# Altium PCB motor_driver_002.PcbDoc
Units mil, origin at the board's own origin, x right, y up, seen from the top; angles counter-clockwise.
Board outline 1417.32 x 1417.32 mil, 2 copper layers (Top Layer, Bottom Layer); 35 components, 30 nets, 146 pads, 62 vias.
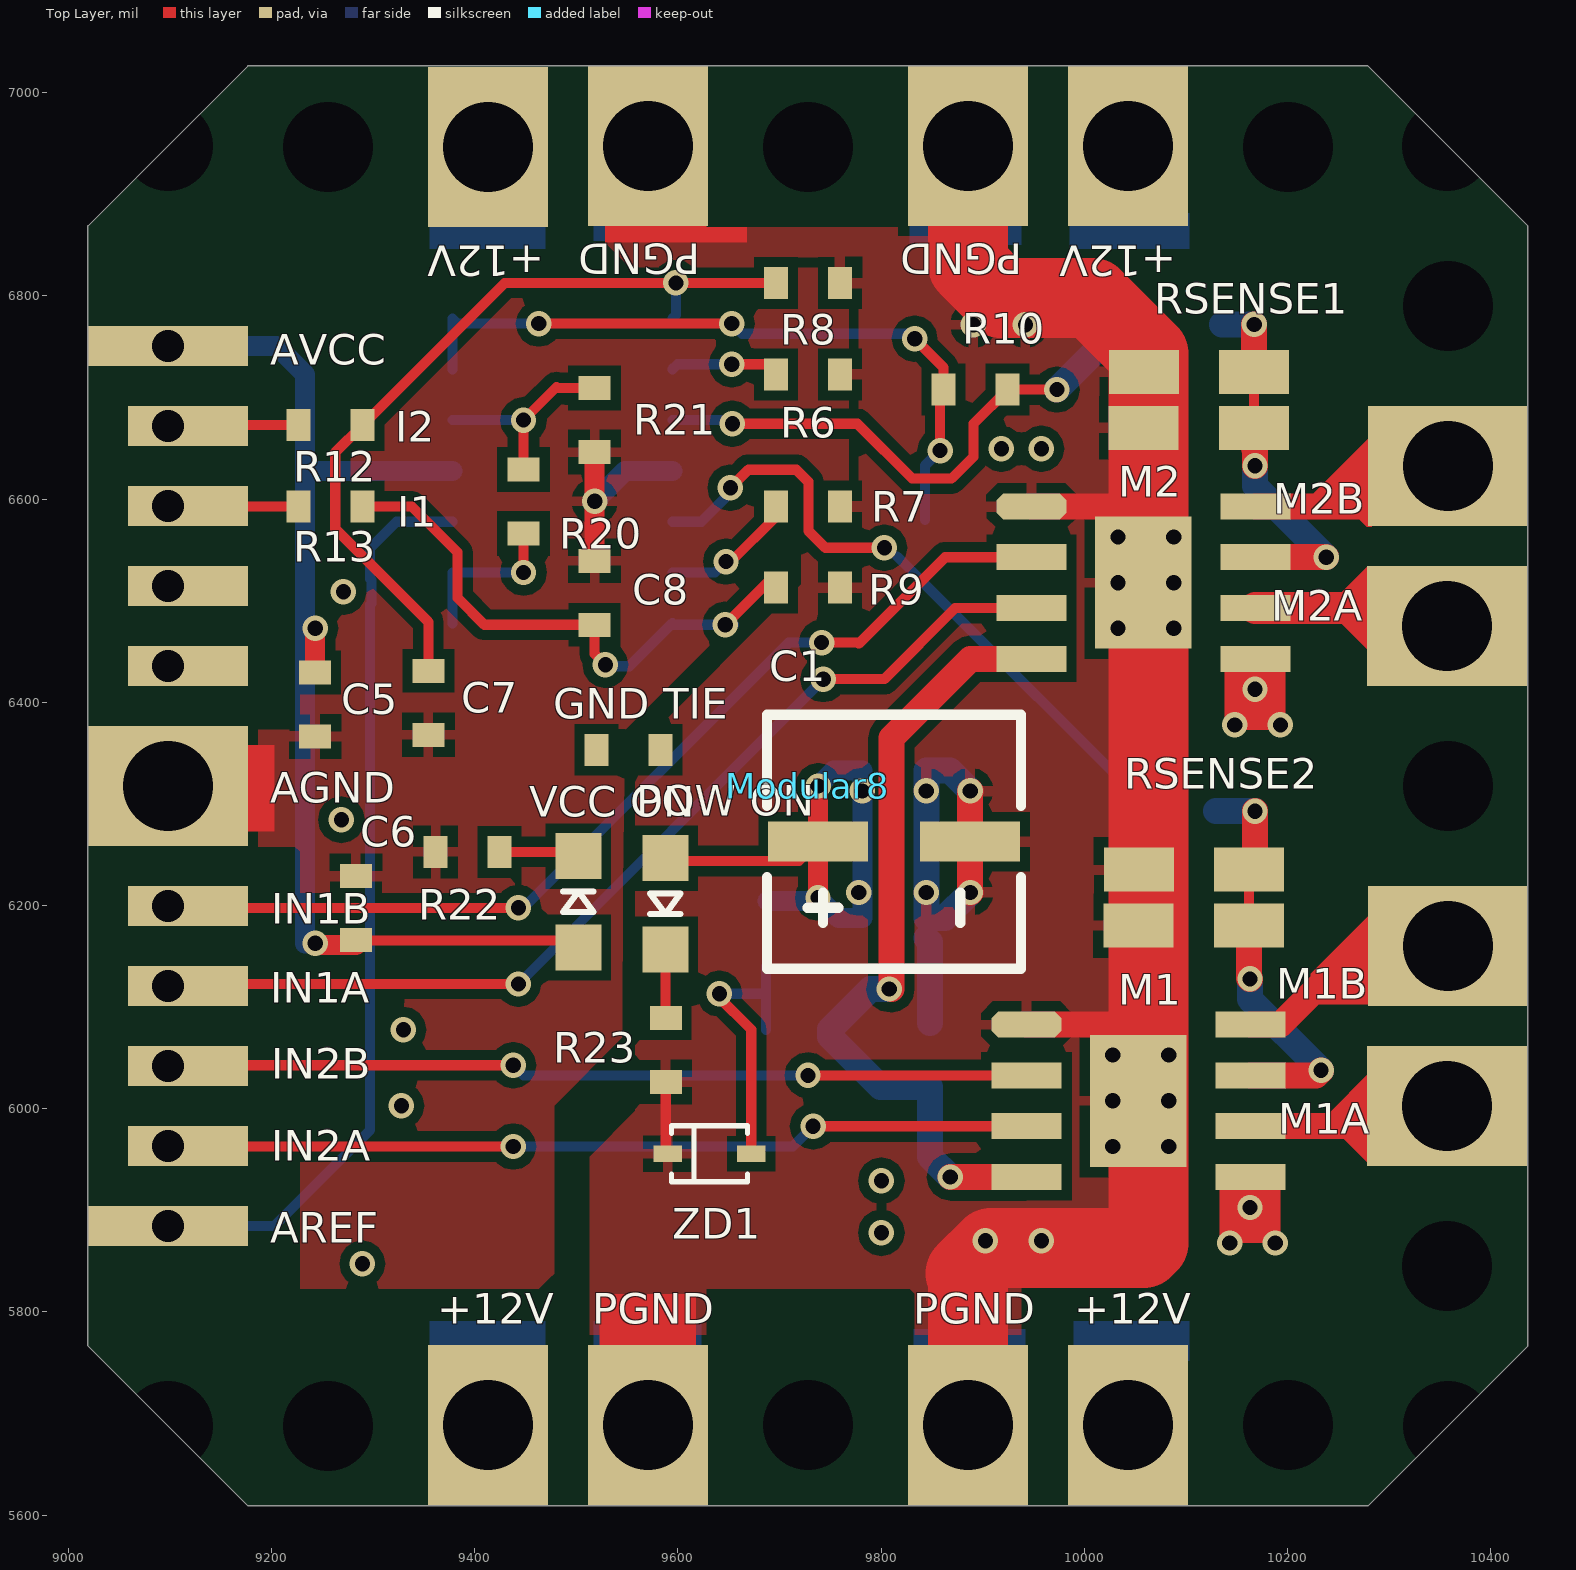
[diagram p0: Top Layer view]
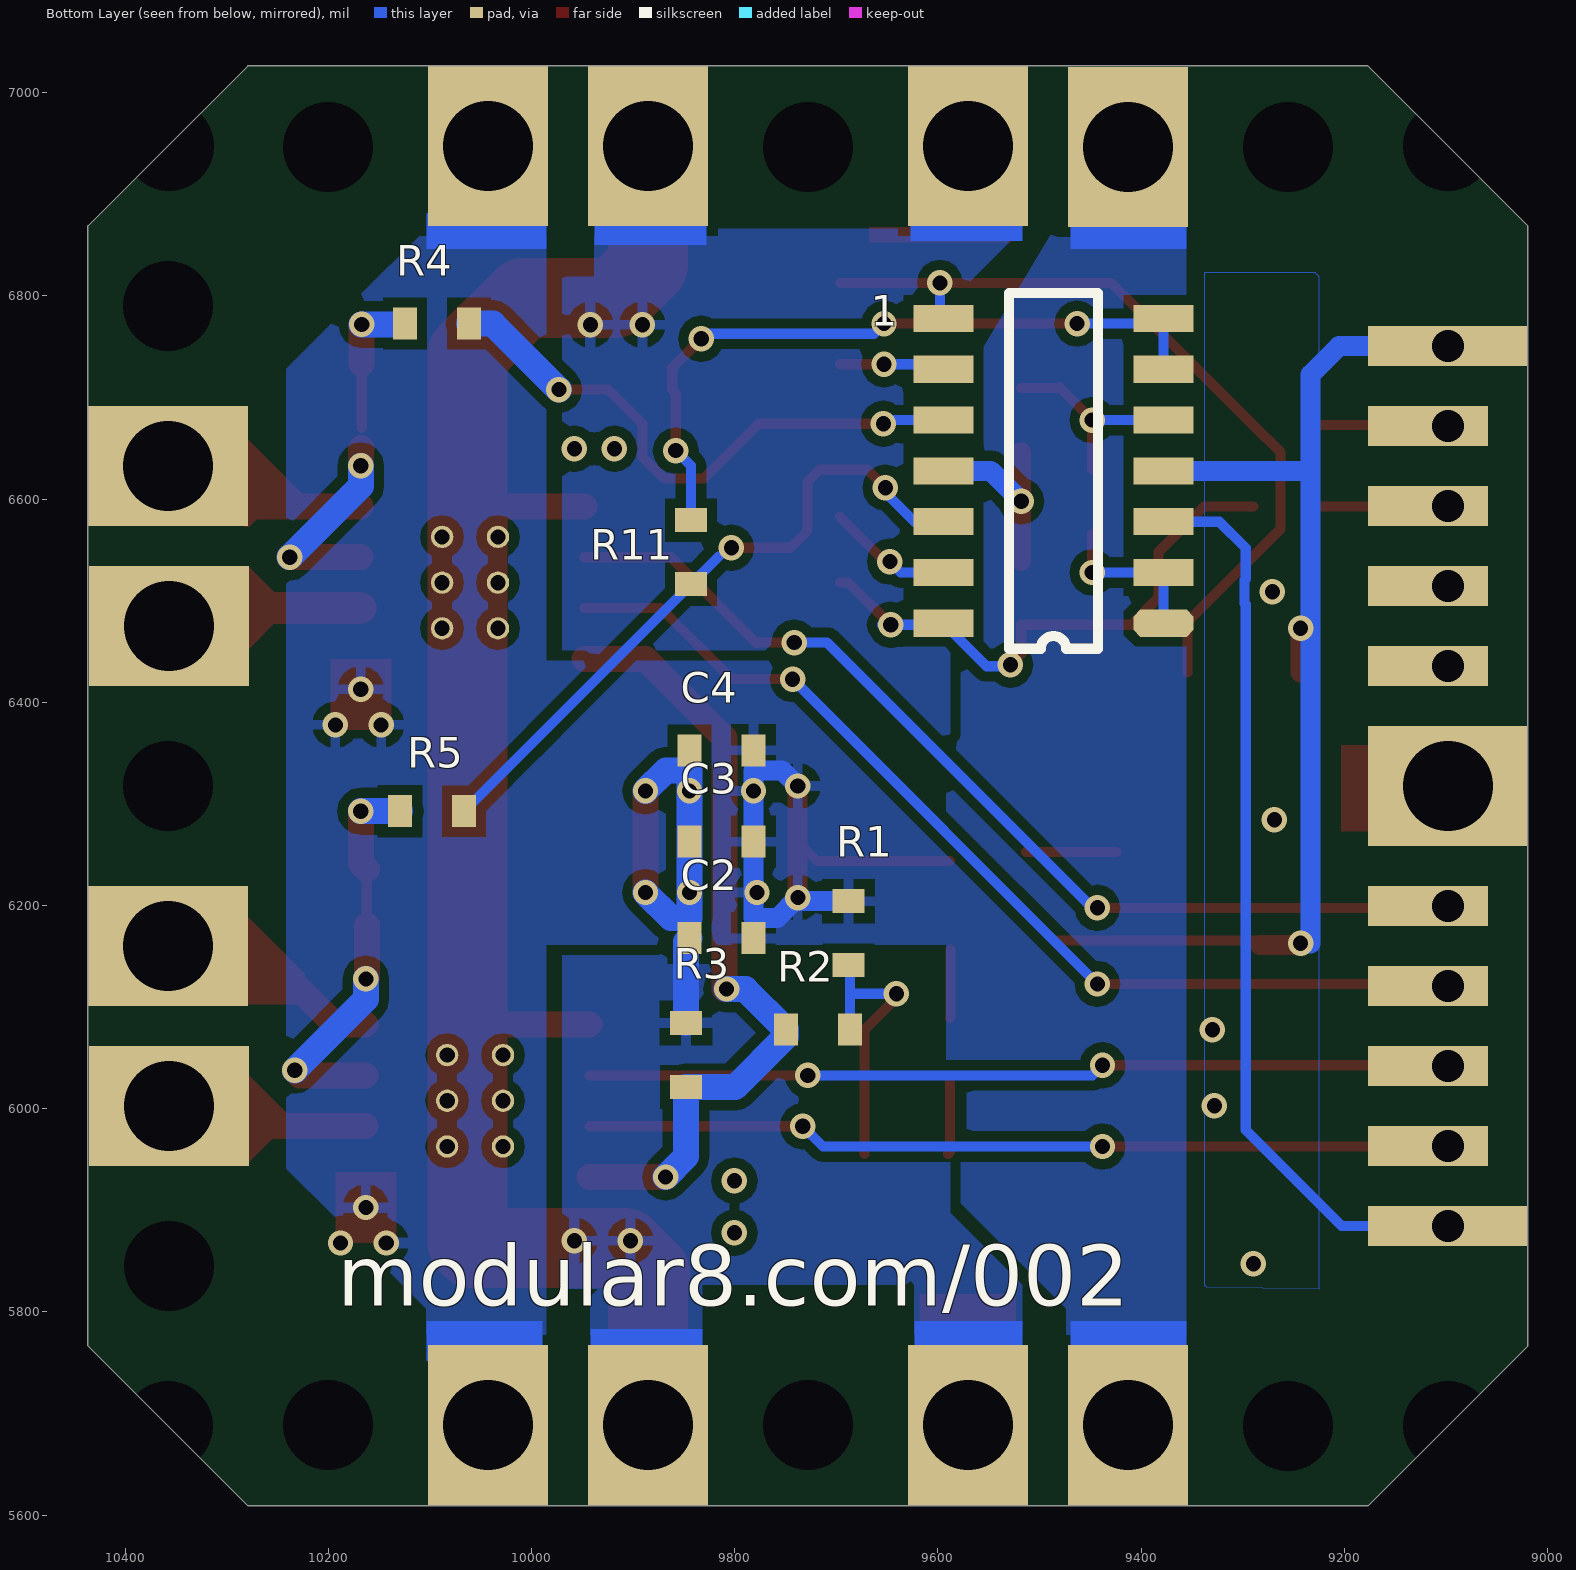
[diagram p1: Bottom Layer view, seen from below]

## Layer stack, top to bottom
Top Solder: solder mask 0.4, Solder Resist, Dk 3.5
Top Layer: signal copper 1.4
Dielectric 1: dielectric 12.6, FR-4, Dk 4.8
Bottom Layer: signal copper 1.4
Bottom Solder: solder mask 0.4, Solder Resist, Dk 3.5

## Board outline
9019.21,6868.94 9176.69,7026.42 10279.06,7026.42 10436.54,6868.94 10436.54,5766.57 10279.06,5609.09 9176.69,5609.09 9019.21,5766.57

## Design rules (kind name [scope] priority, off if disabled: settings)
Clearance [All] p1: gap=10
PolygonConnect [All] p1: connectstyle=Relief reliefconductorwidth=10 reliefentries=4 polygonreliefangle="90 Angle" airgapwidth=10
RoutingVias [All] p1: holewidth=28 width=50 viastyle="Through Hole" minholewidth=28 minwidth=50 maxholewidth=28 maxwidth=50
SolderMaskExpansion [All] p1: expansion=4
UnpouredPolygon [All] p1: allowunpoured=FALSE
Width [All] p1: maxlimit=118.11 minlimit=10 preferedwidth=10
29 further rules are at their usual default settings.

## Components (designator, comment, footprint, x,y, rotation, side; value= is the part's Value field where it differs from the comment)
1 "LM324DT" SO14 9377.95,6477.83 r0 bottom
C1 "C 100uF 25V" "RADIAL CAP 6.5MM" 9812.76,6262.83 r90 top
C2 "C 10uF 25V" 0603 9812.95,6167.83 r0 bottom
C3 "C 1uF 25V" 0603 9812.95,6262.83 r0 bottom
C4 "C 0.1uF 25V" 0603 9812.95,6352.83 r0 bottom
C5 "C 0.1uF 25V" 0603 9242.95,6397.83 r270 top
C6 "C 0.1uF 25V" 0603 9282.95,6197.52 r90 top
C7 "C 22uF 6.3V" 0603 9354.33,6399.61 r270 top
C8 "C 22uF 6.3V" 0603 9517.95,6507.83 r90 top
"GND TIE" "R 0" 0603 9551.18,6353.35 r180 top
M1 "A4950" "SOICN8 THERMAL PAD" 9942.95,6082.83 r0 top
M2 "A4950" "SOICN8 THERMAL PAD" 9947.95,6592.83 r0 top
Modular8 "modular8_power" "modular8 metric power" 9097.95,5687.83 r0 top locked
"POW ON" "LEDG" "0805 - LED" 9587.6,6201.77 r270 top
R1 "R 10k" 0603 9687.95,6172.83 r270 bottom
R2 "R 10k" 0603 9717.95,6077.83 r0 bottom
R3 "R 330" 0603 9847.95,6052.83 r90 bottom
R4 "R 10k 1%" 0603 10092.95,6772.83 r180 bottom
R5 "R 10k 1%" 0603 10097.95,6292.83 r180 bottom
R6 "R 10k 1%" 0603 9727.95,6722.83 r0 top
R7 "R 10k 1%" 0603 9727.95,6592.83 r0 top
R8 "R 300k 1%" 0603 9727.95,6812.83 r180 top
R9 "R 300k 1%" 0603 9727.95,6512.83 r180 top
R10 "R 300k 1%" 0603 9892.95,6707.83 r180 top
R11 "R 300k 1%" 0603 9842.95,6547.83 r90 bottom
R12 "R 10k" 0603 9257.95,6672.83 r180 top
R13 "R 10k" 0603 9257.95,6592.83 r180 top
R20 "R 300k 1%" 0603 9447.95,6597.83 r270 top
R21 "R 300k 1%" 0603 9517.95,6677.83 r270 top
R22 "R 680" 0603 9392.95,6252.83 r180 top
R23 "R 680" 0603 9587.95,6057.83 r270 top
RSENSE1 "R 0.01 0.5%" "1206 SPLIT" 10112.95,6697.83 r180 top
RSENSE2 "R 0.01 0.5%" "1206 SPLIT" 10107.95,6207.83 r180 top
"VCC ON" "LEDG" "0805 - LED" 9501.97,6203.74 r90 top
ZD1 "Zener 5.1V" SOD-323F 9630.91,5955.71 r180 top

## Footprints (in the part's own frame and the unit in brackets; to place one, negate y for a bottom-side part, rotate by r counter-clockwise, add the part's x,y. Pads: shape width x height; smd on the part's side, far side on the other; paste and mask are expansions set on the pad)
0603 [mm]
  rect 0.6x0.8 smd: 1(-0.8,0) 2(0.8,0)
  body extent -1.2,-0.5 1.2,0.5, height 0.01
"0805 - LED" [mil]
  rect 45x45 smd: 1(-45,0) 2(45,0)
  silkscreen extent -10,-15 10,15, body extent -72,-27 72,27, height 0
"1206 SPLIT" [mm]
  rect 1.75x1.1 smd: 1(-1.375,-0.7) 1(-1.375,0.701) 2(1.375,-0.7) 2(1.386,0.701)
  body extent -2.35,-1.35 2.36,1.35
"modular8 metric power" [mm]
  rect 0x0 hole 2.25 unplated copper offset 0.5,0: 999(0,0) 999(0,32) 999(4,0) 999(4,31.976) 999(16,0.024) 999(16,31.976) 999(28,0.024) 999(28,31.976) 999(31.976,4) 999(31.976,32) 999(32,0) 999(32,16) 999(32,28)
  rect 3x1 hole 0.8 copper offset 0.5,0: A_0(0,25) A_1(0,23) A_2(0,21) A_3(0,19) A_4(0,13) A_5(0,11) A_6(0,9) A_7(0,7)
  rect 4x3 hole 2.25: A_GND(0,16) C_0(31.976,8) C_1(32,12) C_2(31.976,20) C_3(32,24)
  rect 4x1 hole 0.8: A_V1(0,27) A_V2(0,5)
  rect 3x4 hole 2.25: B_GND(12,0.024) B_GND(20,0.024) B_VCC(8,0.024) B_VCC(24,0.024) D_GND(12,32) D_GND(20,32) D_VCC(8,31.976) D_VCC(24,32)
  body extent -2,-2 34,34
"RADIAL CAP 6.5MM" [mm]
  rect 1x2.5 smd: 1(0,1.9) 2(0,-1.9)
  silkscreen extent -3.18,-3.18 3.18,3.18, body extent -3.3,-3.3 3.3,3.3
SO14 [mm]
  oct 1.5x0.677 smd: 1(0,0)
  rect 1.5x0.677 smd: 2(0,-1.27) 3(0,-2.54) 4(0,-3.81) 5(0,-5.08) 6(0,-6.35) 7(0,-7.62) 8(5.5,-7.62) 9(5.5,-6.35) 10(5.5,-5.08) 11(5.5,-3.81) 12(5.5,-2.54) 13(5.5,-1.27) 14(5.5,0)
  silkscreen extent 1.64,-8.25 3.86,0.64
SOD-323F [mm]
  rect 0.71x0.403 smd: 1(-1.045,0) 2(1.045,0)
  silkscreen extent -0.95,-0.7 0.95,0.7, body extent -1.4,-0.7 1.4,0.7
"SOICN8 THERMAL PAD" [mil]
  oct 68.9x25.59 smd: 1(0,0)
  round 22 hole 15 unplated: 1(85,-120) 1(85,-75) 1(85,-30) 1(140,-120) 1(140,-75) 1(140,-30)
  rect 95x130 smd: 1(110,-75)
  rect 68.9x25.59 smd: 2(0,-50) 3(0,-100) 4(0,-150) 5(220.47,-150) 6(220.47,-100) 7(220.47,-50) 8(220.47,0)
  body extent -38,-167 259,17

## Via types
v1: diameter 25, hole 15, Top Layer to Bottom Layer, 62 vias

## Nets (pads, with @x,y where several pads share a name; then routed paths per layer and width w, separated by ;. In a path a pad name is that pad's centre, name@x,y a point inside that pad or via, vN(x,y) a via of type N, cw(c..) or ccw(c..) an arc to the next point about the centre after c; other vN are vias at no path point)
2.048V: 1.6 1.7 R10.2 R11.2 | length 711.3
  Top Layer w10: v1(9462.95,6772.83) v1(9652.95,6772.83) ; v1(9832.95,6757.83) 9861.46,6729.33 R10.2 9857.95,6704.33 v1(9857.95,6647.83)
  Bottom Layer w10: 1.6 1.7 9382.95,6772.83 v1(9462.95,6772.83) ; v1(9652.95,6772.83) 9662.95,6762.83 9827.95,6762.83 v1(9832.95,6757.83) ; R11.2 9842.95,6632.83 v1(9857.95,6647.83)
4.096V: 1.3 Modular8.A_V2 | length 903.6
  Bottom Layer w10: Modular8.A_V2 9202.6,5884.69 9296.99,5979.08 9296.99,6496.29 9298.17,6497.47 9298.17,6520.25 9296.99,6521.43 9296.99,6551.87 9322.95,6577.83 1.3
5V: 1.4 "VCC ON.1" C5.1 C6.1 Modular8.A_V1 | length 1136.6
  Top Layer w10: C6.1 9282.95,6165.49 9483.33,6165.49
  Top Layer w19.68: v1(9242.95,6162.83) 9244.45,6161.34 C6.1@9282.95,6161.34 ; C5.1 v1(9242.95,6472.83)
  Bottom Layer w19.68: Modular8.A_V1 9204.96,6750.83 9233.03,6722.76 9233.03,6627.83 ; v1@9233.03,6162.83 9233.03,6627.83 ; 1.4 9233.03,6627.83
+12V: "POW ON.1" C1.1 C2.1 C3.1 C4.1 M1.5 M2.5 Modular8.B_VCC Modular8.D_VCC R1.1 | length 565.8
  Top Layer w10: 9587.95,6243.83 9718.95,6243.83 C1.1
  Top Layer w19.68: v1(9737.76,6207.83) 9737.95,6208.03 C1.1 v1(9737.95,6317.64)
  Bottom Layer w19.68: R1.1 9734.25,6204.33 v1(9737.76,6207.83) 9757.76,6187.83 9781.46,6187.83 C3.1 9781.46,6332.83 9753.15,6332.83 v1(9737.95,6317.64)
  other v1: 10142.95,5867.83 10187.95,5867.83 10162.95,5902.83 9777.95,6212.83 9781.46,6312.83 10147.95,6377.83 10192.95,6377.83 10167.95,6412.83
AGND: 1.11 C5.2 C6.2 C7.2 C8.2 Modular8.A_GND R21.2 R22.2 | length 196
  Top Layer w19.68: C8.2 v1(9517.95,6597.83) R21.2
  Bottom Layer w19.68: v1(9517.95,6597.83) 9547.95,6627.83 1.11
CURRENT1: Modular8.A_1 R13.2 | length 128.7
  Top Layer w10: Modular8.A_1 9098.46,6592.83 R13.2
CURRENT2: Modular8.A_0 R12.2 | length 128.8
  Top Layer w10: Modular8.A_0 9098.7,6672.83 R12.2
M1A: M1.6 Modular8.C_0 | length 201.7
  Top Layer w25.59: M1.6 10336.88,5982.83 Modular8.C_0
M1B: M1.8 Modular8.C_1 | length 226.4
  Top Layer w25.59: M1.8 10192.95,6082.83 10270.39,6160.28 Modular8.C_1
M2A: M2.6 Modular8.C_2 | length 227.4
  Top Layer w31.5: M2.6 10339.24,6492.83 Modular8.C_2 Modular8.C_2@10334.44,6452.83
M2B: M2.8 Modular8.C_3 | length 260.9
  Top Layer w25.59: M2.8 10317.91,6592.83 Modular8.C_3 Modular8.C_3@10302.83,6632.72
Net1_1: 1.1 1.2 R20.2 | length 158.5
  Top Layer w10: v1(9447.95,6527.83) R20.2
  Bottom Layer w10: 1.1 1.2 v1(9447.95,6527.83)
Net1_5: 1.5 R20.1 R21.1 | length 202.4
  Top Layer w10: R20.1 v1(9447.95,6677.83) 9480.45,6710.33 9481.46,6709.33 R21.1
  Bottom Layer w10: 1.5 v1(9447.95,6677.83)
Net1_8: 1.8 C7.1 R8.2 R12.1 | length 794
  Top Layer w10: C7.1@9354.33,6429.33 9354.33,6479.18 9262.64,6570.87 9262.64,6646.02 R12.1 9429.45,6812.83 v1(9597.95,6812.83) R8.2
  Bottom Layer w10: 1.8 9597.95,6781.3 v1(9597.95,6812.83)
Net1_9: 1.9 R6.1 | length 104
  Top Layer w10: v1(9652.95,6732.83) R6.1@9696.46,6732.83
  Bottom Layer w10: 1.9 9599.49,6732.83 v1(9652.95,6732.83)
Net1_10: 1.10 R4.2 R10.1 | length 567.5
  Top Layer w10: v1(9653.54,6674.21) 9776.57,6674.21 9830.45,6620.33 9869.34,6620.33 9890.81,6641.8 9890.81,6674.19 R10.1 v1(9972.95,6707.83)
  Bottom Layer w10: 1.10 v1@9649.61,6677.83
  Bottom Layer w25.59: v1(9972.95,6707.83) 10037.95,6772.83 R4.2
Net1_12: 1.12 R5.2 R11.1 | length 645.9
  Top Layer w10: v1(9651.57,6611.22) 9669.29,6628.94 9716.54,6628.94 9728.35,6617.13 9728.35,6568.9 9745.08,6552.17 v1(9803.15,6552.17)
  Bottom Layer w10: 1.12 9622.95,6577.83 v1@9653.96,6608.84 ; 9815.71,6543.58 R11.1 R5.2
Net1_13: 1.13 R7.1 | length 124.8
  Top Layer w10: v1(9647.2,6538.58) 9652.2,6538.58 R7.1@9696.46,6582.83
  Bottom Layer w10: 1.13 9636.46,6527.83 v1(9647.2,6538.58)
Net1_14: 1.14 C8.1 R9.2 R13.1 | length 559.2
  Top Layer w10: R13.1 9337.95,6592.83 9382.95,6547.83 9382.95,6502.83 9409.45,6476.34 C8.1 9517.95,6447.6 v1(9528.54,6437.01) ; v1(9646.46,6476.34) 9687.95,6517.83 R9.2@9696.46,6517.83
  Bottom Layer w10: v1(9528.54,6437.01) 9530.04,6435.51 9552.17,6435.51 1.14 9595.98,6476.34 v1(9646.46,6476.34) v1@9654.96,6476.34
NetM1_2: M1.2 Modular8.A_6 | length 854.4
  Top Layer w10: Modular8.A_6 9098.62,6042.83 v1(9437.95,6042.83) ; v1(9727.95,6032.83) M1.2
  Bottom Layer w10: v1(9437.95,6042.83) 9447.95,6032.83 v1(9727.95,6032.83) v1@9727.95,6037.83
NetM1_3: M1.3 Modular8.A_7 | length 874.7
  Top Layer w10: Modular8.A_7 9098.54,5962.83 v1(9437.95,5962.83) ; v1(9732.95,5982.83) M1.3
  Bottom Layer w10: Modular8.A_7@9098.54,5962.83 Modular8.A_7 Modular8.A_7@9112.36,5977.83 ; v1(9437.95,5962.83) 9712.95,5962.83 v1(9732.95,5982.83)
NetM1_4: M1.4 M2.4 R2.2 R3.1 | length 789.8
  Top Layer w25.59: v1@9809.96,6117.83 9809.96,6364.84 9887.95,6442.83 M2.4 ; v1(9867.95,5932.83) M1.4
  Bottom Layer w25.59: v1(9807.95,6117.83) 9789.45,6117.83 R2.2 9749.45,6071.34 9799.45,6021.34 R3.1 9847.95,5952.83 v1(9867.95,5932.83)
NetM1_7: M1.7 R5.1 RSENSE2.1 | length 396.9
  Top Layer w10: RSENSE2.1@10162.09,6180.24 RSENSE2.1@10162.09,6235.39
  Top Layer w25.59: RSENSE2.1@10162.09,6180.24 10162.09,6128.7 v1(10162.95,6127.83) ; RSENSE2.1@10162.09,6235.39 10167.95,6241.26 v1(10167.95,6292.83) ; M1.7 10227.95,6032.83 v1(10232.95,6037.83)
  Bottom Layer w25.59: R5.1 v1(10167.95,6292.83) ; v1(10162.95,6127.83) 10162.95,6107.83 v1(10232.95,6037.83)
NetM2_2: M2.2 Modular8.A_4 | length 971.4
  Top Layer w10: Modular8.A_4 Modular8.A_4@9099.76,6197.83 ; Modular8.A_4@9122.95,6197.52 9442.64,6197.52 v1(9442.95,6197.83) ; v1(9741.34,6458.81) 9776.97,6458.81 9777.95,6457.83 9862.95,6542.83 M2.2
  Bottom Layer w10: v1(9442.95,6197.83) 9447.95,6197.83 9708.93,6458.81 v1(9741.34,6458.81)
NetM2_3: M2.3 Modular8.A_5 | length 1004.1
  Top Layer w10: Modular8.A_5 9099.88,6122.83 v1(9442.95,6122.83) ; v1(9742.95,6422.83) 9802.95,6422.83 9872.95,6492.83 M2.3
  Bottom Layer w10: v1(9442.95,6122.83) v1(9742.95,6422.83)
NetM2_7: M2.7 R4.1 RSENSE1.1 | length 332.3
  Top Layer w10: RSENSE1.1@10167.09,6670.24 RSENSE1.1@10167.09,6725.39
  Top Layer w25.59: RSENSE1.1@10167.09,6650.24 10167.95,6649.37 v1(10167.95,6632.83) ; RSENSE1.1@10167.09,6732.83 v1(10167.09,6771.97) ; M2.7 v1(10237.95,6542.83)
  Bottom Layer w25.59: R4.1@10135.32,6771.97 v1(10167.09,6771.97) ; v1(10167.95,6632.83) 10167.95,6612.83 v1(10237.95,6542.83)
"NetPOW ON_2": "POW ON.2" R23.1 | length 67.6
  Top Layer w10: 9587.6,6156.77 9587.6,6089.69 R23.1
NetR1_2: R1.2 R2.1 ZD1.1 | length 279.1
  Top Layer w10: v1@9638.78,6111.22 9672.05,6077.95 ZD1.1
  Bottom Layer w10: v1(9640.75,6113.19) 9686.46,6113.19 ; R2.1 9686.46,6113.19 ; R1.2 9686.46,6139.84 9686.46,6113.19
NetR22_1: "VCC ON.2" R22.1 | length 88.5
  Top Layer w10: R22.1 9512.95,6252.83
PGND: C1.2 C2.2 C3.2 C4.2 M1.1 M2.1 Modular8.B_GND Modular8.D_GND R3.2 R6.2 R7.2 R8.1 R9.1 R23.2 RSENSE1.2 RSENSE2.2 ZD1.2 | length 2301.6
  Top Layer w10: R23.2 9587.95,5957.52 ZD1.2
  Top Layer w25.59: v1(9887.76,6212.83) 9887.56,6213.03 C1.2 9887.56,6312.64 v1(9887.76,6312.83) ; M1.1@9942.95,6082.83 10057.95,6082.83 10062.95,6077.83 ; M2.1@9947.95,6592.83 10057.95,6592.83 10062.95,6597.83 ; M2.1@10057.95,6552.83 M2.1@10062.95,6557.83
  Top Layer w78.74: Modular8.B_GND@9885.35,5688.79 9885.35,5835.43 9882.95,5837.83 9907.95,5862.83 10057.95,5862.83 10062.95,5867.83 10062.95,6077.83 10062.95,6557.83 10062.95,6597.83 10062.95,6742.83 10007.95,6797.83 9917.95,6797.83 9885.35,6830.43 Modular8.D_GND@9885.35,6947.68
  Bottom Layer w25.59: C2.2 9847.95,6164.33 R3.2 ; v1(9887.76,6212.83) 9862.76,6187.83 9844.45,6187.83 v1(9844.45,6212.83) C3.2 9844.45,6332.83 9867.76,6332.83 v1(9887.76,6312.83)
  other v1: 9902.56,5870.08 9957.68,5870.08 9844.45,6312.83 9890.75,6771.65 9941.93,6771.65
pads on no net: "GND TIE.1" "GND TIE.2" Modular8.999 Modular8.A_2 Modular8.A_3
copper on no net:
  other v1: 9289.37,5847.44 9800.2,5877.95 9800.2,5929.13 9327.76,6002.95 9329.72,6077.76 9268.7,6284.45 9270.67,6508.86 9918.31,6649.61 9957.68,6649.61

## Polygon pours and split planes (outlines as drawn)
PGND on Top Layer "Bottom Layer-No Net" (solid, remove dead copper, pour order 4): 9597.95,6892.83 9512.95,6867.83 9559.92,6820.87 9627.95,6820.87 9721.16,6779.63 9721.16,6516.04 9557.95,6352.83 9557.95,5997.83 9512.95,5952.83 9512.95,5752.83 9627.95,5752.83 9627.95,5822.83 9827.95,5822.83 9832.95,5817.83 9832.95,5747.83 9927.95,5747.83 9937.95,5757.83 9937.95,5862.83 10057.95,5862.83 10062.95,5867.83 10062.95,6742.83 10042.95,6742.83 9987.95,6797.83 9955.35,6830.43 9885.35,6830.43 9885.35,6887.83 9875.35,6877.83 9827.95,6877.83 9827.95,6867.83 9632.95,6867.83 9607.95,6892.83
AGND on Top Layer "Bottom Layer-No Net" (solid, remove dead copper, pour order 6): 9167.95,6257.83 9222.95,6257.83 9227.95,6252.83 9227.95,5822.83 9462.95,5822.83 9472.95,5832.83 9477.95,5837.83 9477.95,5997.83 9477.95,6002.83 9545.27,6070.16 9545.8,6219.26 9547.95,6372.83 9667.95,6492.83 9672.95,6492.83 9767.95,6492.83 9772.95,6497.83 9767.95,6502.83 9767.95,6602.83 9767.95,6607.83 9767.95,6827.83 9547.95,6827.83 9227.95,6827.83 9227.95,6377.83 9232.95,6372.83 9147.95,6372.83 9147.95,6272.83
PGND on Bottom Layer "Bottom Layer-No Net" (solid, remove dead copper, pour order 21): 9516.73,6866.14 9587.6,6795.28 9587.6,6748.03 9587.6,5897.64 9579.72,5889.76 9516.73,5826.77 9516.73,5818.9 9516.73,5751.97 9520.67,5748.03 9532.48,5759.84 9623.03,5759.84 9623.03,5826.77 9626.97,5830.71 9630.91,5826.77 9831.69,5826.77 9831.69,5748.03 9835.63,5751.97 9941.93,5751.97 9941.93,5814.96 9934.06,5822.83 9969.49,5822.83 9969.49,6822.83 9965.55,6818.9 9937.99,6818.9 9937.99,6875.72 9845.29,6872.23 9827.76,6866.14
+12V on Bottom Layer "Bottom Layer-No Net" (solid, remove dead copper, pour order 12): 10103.35,6885.83 10103.35,6866.14 10241.14,6728.35 10241.14,5940.94 10103.35,5803.15 10103.35,5744.09 9985.24,5744.09 9985.24,5803.15 9985.24,6885.83
+12V on Bottom Layer "Bottom Layer-No Net" (solid, remove dead copper, pour order 14): 9355.32,6885.83 9355.32,5744.09 9473.43,5744.09 9473.43,5803.15 9591.54,5921.26 9591.54,6669.29 9591.54,6688.98 9473.43,6885.83
+12V on Bottom Layer "Bottom Layer-No Net" (solid, remove dead copper, pour order 19): 9493.11,6440.94 9493.11,6157.48 9497.05,6153.54 9504.92,6161.42 10099.41,6161.42 10099.41,6440.94
no net on Bottom Layer "Bottom Layer-No Net" (solid, remove dead copper, shelved, pour order 8): 9224.41,5822.83 9224.41,6818.9 9226.38,6820.87 9228.35,6822.83 9337.6,6822.83 9337.6,5826.77 9335.63,5824.8

## Other copper
Top Layer:
  rectangle net AGND: 9162.95,6272.83 9202.95,6357.83
  rectangle net PGND: 9612.95,6852.83 9667.95,6867.83
  rectangle net PGND: 9527.95,6852.83 9627.95,6882.83
  rectangle net PGND: 9522.95,5747.83 9617.95,5817.83
  rectangle net +12V: 10132.95,5867.83 10192.95,5937.83
  rectangle net +12V: 10137.95,6372.83 10197.95,6442.83
  region net M1A: 10277.95,5947.83 10237.95,5987.83 10237.95,5992.83 10282.95,6037.83 10282.95,5947.83
  region net M1B: 10222.95,6102.83 10222.95,6132.83 10287.95,6197.83 10287.95,6102.83
  region net M2B: 10277.95,6572.83 10247.95,6602.83 10222.95,6602.83 10282.95,6662.83 10282.95,6572.83
  region net M2A: 10277.95,6532.83 10247.95,6502.83 10247.95,6477.83 10252.95,6477.83 10277.95,6452.83 10287.95,6452.83 10292.95,6457.83 10292.95,6532.83
Bottom Layer:
  rectangle net PGND: 9831.69,5755.91 9941.93,5783.46
  rectangle net PGND: 9516.73,5759.84 9623.03,5791.34
  rectangle net PGND: 9827.76,6850.39 9937.99,6874.02
  rectangle net PGND: 9516.73,6854.33 9626.97,6874.02
  rectangle net +12V: 9355.32,6846.46 9469.49,6877.95
  rectangle net +12V: 9985.24,6846.46 10103.35,6881.89
  rectangle net +12V: 9989.17,5751.97 10103.35,5791.34
  rectangle net +12V: 9355.32,5751.97 9469.49,5791.34

## Silkscreen, mask and mechanical layers (free items; w line width, h text height)
Top Overlay:
  text "PGND" at 9622.05,6851.38 h30 r180
  text "PGND" at 9938.98,6851.38 h30 r180
  text "+12V" at 9468.5,6849.41 h30 r180
  text "+12V" at 10090.55,6849.41 h30 r180
  text "AVCC" at 9198.82,6732.28 h30
  text "I2" at 9321.85,6656.5 h30
  text "M2B" at 10186.02,6585.63 h30
  text "I1" at 9323.82,6572.83 h30
  text "M2A" at 10184.06,6480.31 h30
  text "AGND" at 9198.82,6301.18 h30
  text "IN1B" at 9199.8,6182.09 h30
  text "M1B" at 10188.98,6108.27 h30
  text "IN1A" at 9198.82,6104.33 h30
  text "IN2B" at 9199.8,6029.53 h30
  text "M1A" at 10190.94,5975.39 h30
  text "IN2A" at 9199.8,5948.82 h30
  text "AREF" at 9198.82,5868.11 h30
  text "+12V" at 9363.19,5788.39 h30
  text "PGND" at 9515.75,5788.39 h30
  text "PGND" at 9831.69,5788.39 h30
  text "+12V" at 9990.16,5788.39 h30
Bottom Overlay:
  text "modular8.com/002" at 10190.94,5806.1 h60